# Altium PCB PCB.PcbDoc (part 2 of 3)
Units mm, origin at the board's own origin, x right, y up, seen from the top; angles counter-clockwise.
Board outline 82.04 x 50.04 mm, 4 copper layers (Top Layer, Layer 1, Layer 2, Bottom Layer), stack 1.604 mm thick; 179 components, 140 nets, 1023 pads, 520 vias.
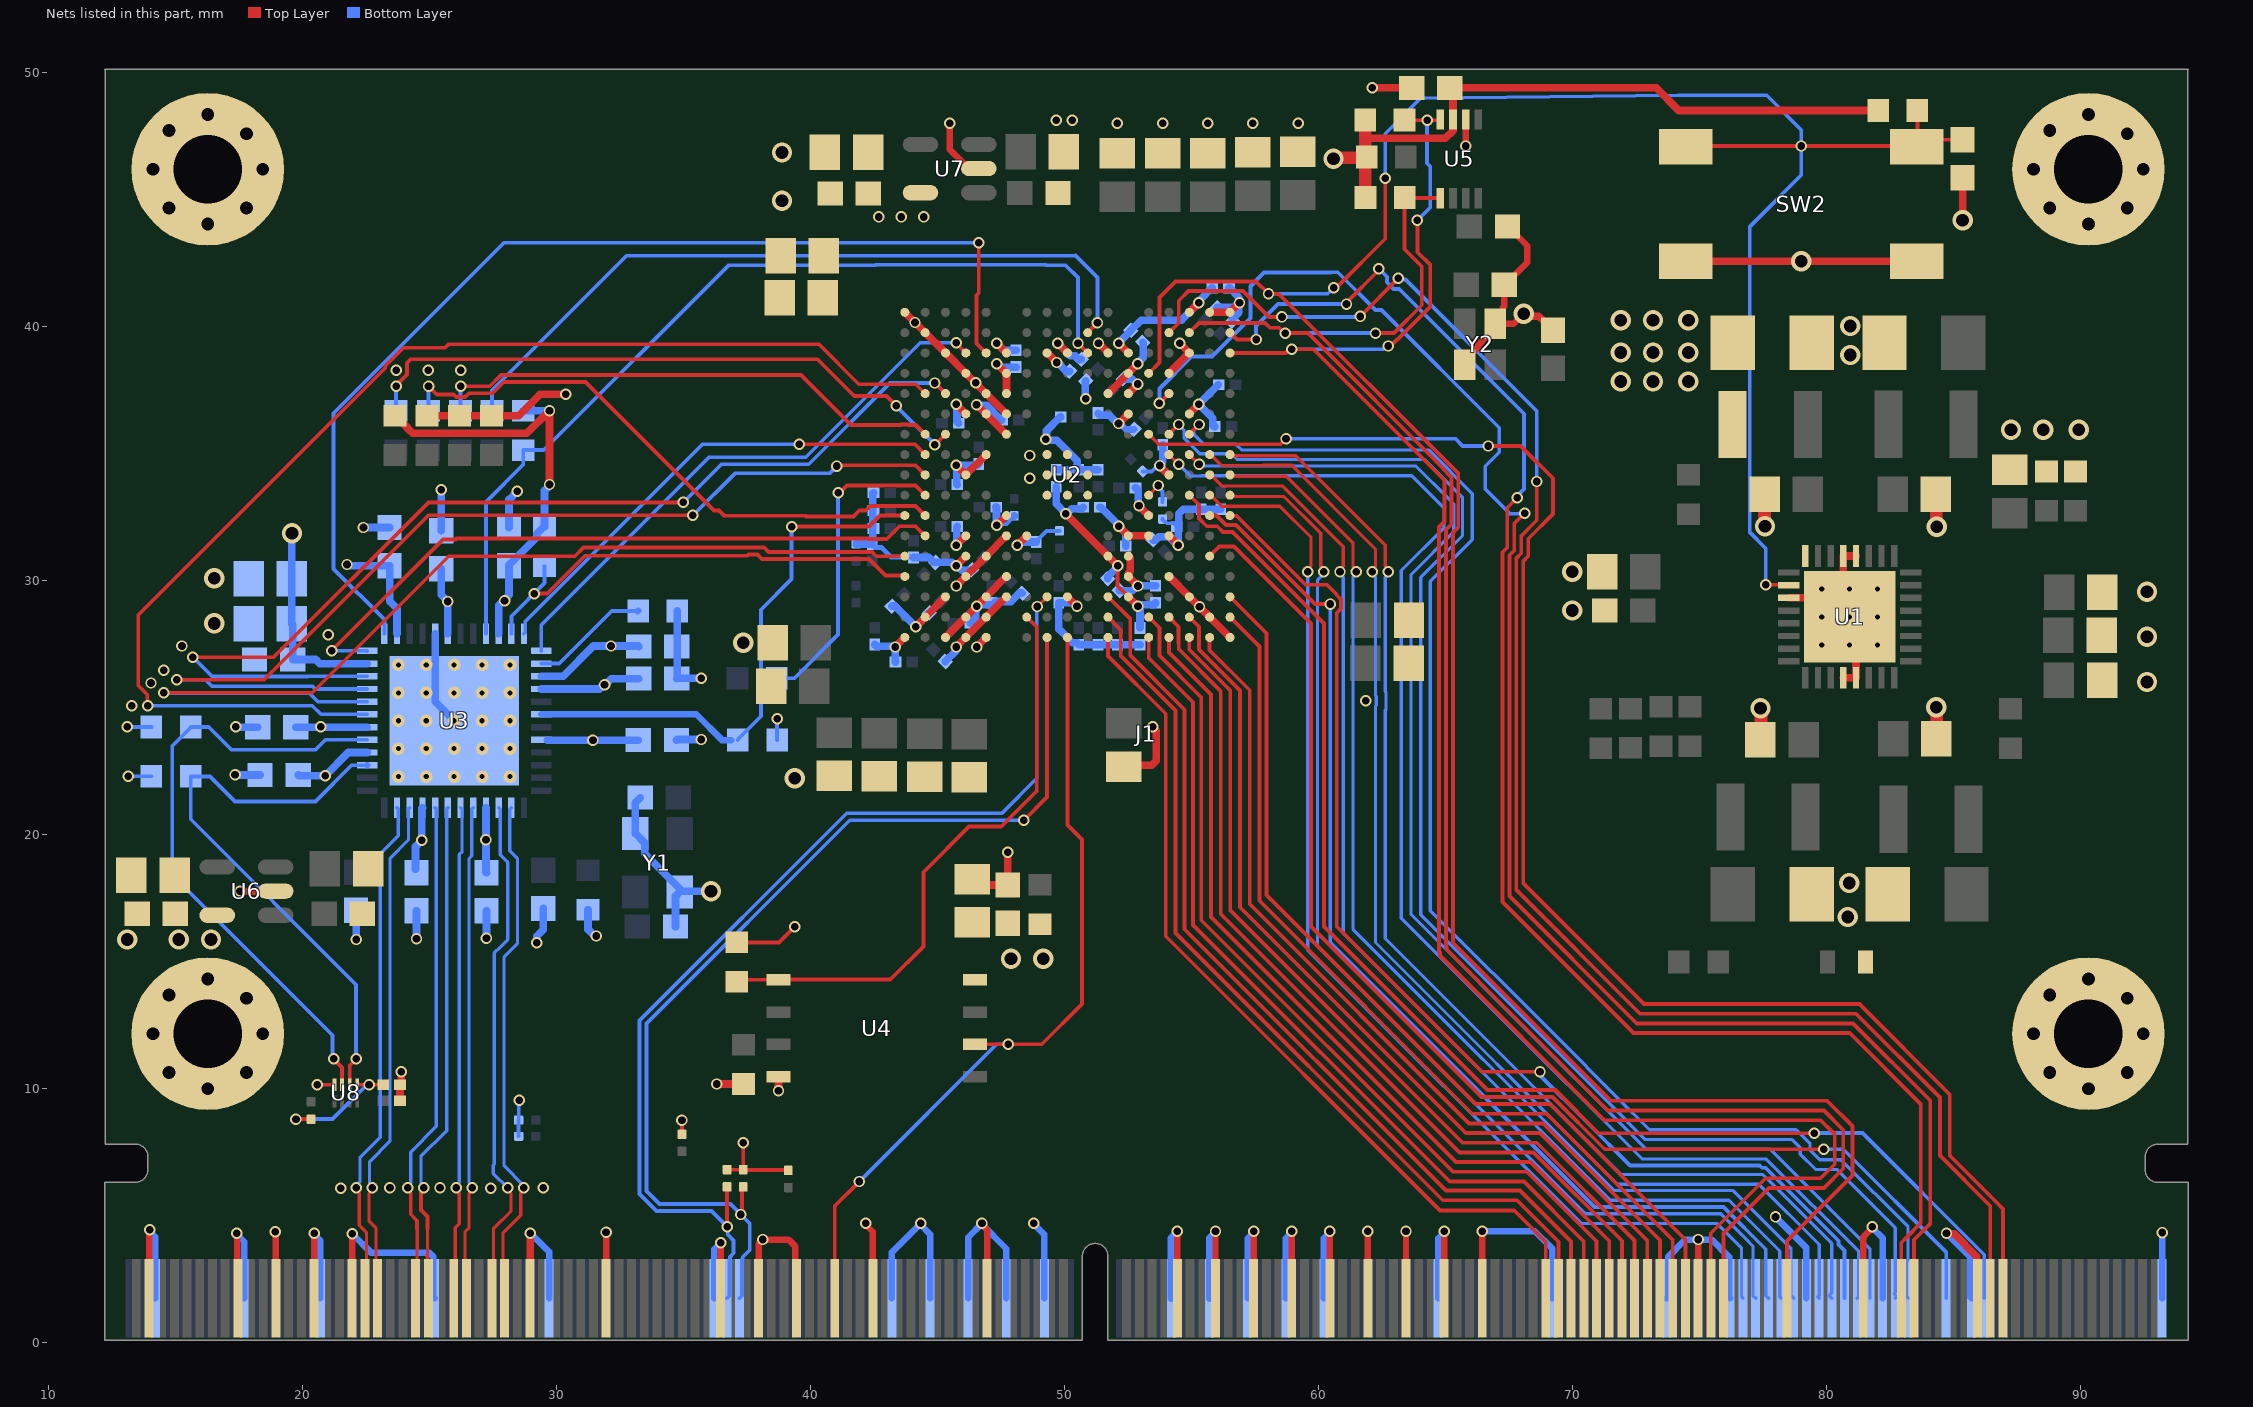
[diagram p4: the nets of this part, all layers, seen from the top]

## Via types
v1: diameter 0.45, hole 0.3, Top Layer to Bottom Layer, tented both sides, 367 vias
v2: diameter 0.8, hole 0.5, Top Layer to Bottom Layer, tented both sides, 87 vias
v3: diameter 0.5, hole 0.2, Top Layer to Bottom Layer, 34 vias
v4: diameter 0.8, hole 0.5, Top Layer to Bottom Layer, 32 vias

## Nets (pads, with @x,y where several pads share a name; then routed paths per layer and width w, separated by ;. In a path a pad name is that pad's centre, name@x,y a point inside that pad or via, vN(x,y) a via of type N, cw(c..) or ccw(c..) an arc to the next point about the centre after c; other vN are vias at no path point) (continued)
ETH1V8: C12.2 C13.2 C79.2 C80.2 C81.2 C96.2 C97.2 C102.2 R10.2 R14.2 R15.2 R16.2 R17.2 R24.2 R26.2 R27.2 R28.2 R31.2 R34.2 R36.2 R37.2 R38.2 R41.2 R44.1 U3.16 U3.34 U3.40 U4.8 U6.5 U8.1 | length 41.3
  Top Layer w0.15: v1(19.729,8.807) R44.1@20.32,8.807 ; U8.1@22.144,10.16 v1(22.606,10.16) C102.2@23.165,10.16 ; R38.2@34.925,8.211 v1(34.925,8.763) ; R34.2@36.703,6.814 R31.2@37.338,6.814 ; R26.2@37.084,15.761 38.748,15.761 v1(39.37,16.383) ; v1(37.338,7.874) R31.2@37.338,6.814 ; R41.2@39.112,6.787 39.098,6.801 37.352,6.801 R31.2@37.338,6.814
  Top Layer w0.3: R10.2@23.622,36.501 23.647,36.501 24.134,36.014 24.134,35.995 24.328,35.801 28.816,35.801 v1(29.711,36.696) v1(29.711,33.789) ; v1(36.296,10.186) R27.2@37.353,10.186
  Bottom Layer w0.15: v1(13.091,24.247) R17.2@14.035,24.247 ; v1(13.131,22.302) R16.2@14.035,22.302 ; v1(19.729,8.807) 21.171,8.807 22.525,10.16 v1(22.606,10.16) ; R37.2@28.492,8.128 R36.2@28.492,8.763 28.502,8.774 28.502,9.544 v1(28.513,9.554) ; R24.2@38.671,23.727 v1(38.671,24.574)
  Bottom Layer w0.3: C79.2@19.812,22.352 19.834,22.33 v1(20.878,22.33) 21.787,23.239 U3.16@22.533,23.239 ; U3.34@27.708,27.914 27.708,29.033 28.117,29.442 C80.2@28.117,30.597 28.117,30.622 29.214,31.719 29.214,31.847 29.489,32.122 R15.2@29.514,32.122 29.514,33.552 29.711,33.749 v1(29.711,33.789) ; R14.2@28.675,36.696 v1(29.711,36.696) ; U3.40@29.383,25.739 31.668,25.739 31.836,25.908 31.918,25.908 32.15,26.14 C81.2@33.222,26.14
  other v1: 31.877,25.908 27.94,29.21
  other v2: 47.879,15.113 49.149,15.113 15.113,15.875 16.383,15.875
ETH1V15: C9.1 C69.2 C70.2 C71.2 C72.2 C73.2 C74.2 C75.2 C76.2 C77.2 C78.2 L4.2 U1.32 U3.4 U3.9 U3.18 U3.23 U3.26 U3.30 U3.39 U3.44 | length 31
  Bottom Layer w0.3: v2(19.569,31.866) C70.2@19.569,30.077 C69.2@19.569,28.299 19.596,28.272 C76.2@19.596,26.902 20.497,26.902 20.66,26.739 U3.23@22.533,26.739 ; C74.2@19.723,24.235 19.727,24.239 U3.18@22.533,24.239 ; v1@21.727,30.597 C75.2@23.418,30.597 23.418,29.188 23.708,28.898 U3.26@23.708,27.914 ; C77.2@24.434,18.635 24.434,19.536 v1(24.688,19.79) 24.688,21.044 U3.9@24.708,21.064 ; C78.2@25.45,30.47 25.45,29.442 v1(25.708,29.184) U3.30@25.708,27.914 ; U3.4@27.208,21.064 27.208,18.528 C73.2@27.228,18.508 ; U3.39@29.383,26.239 30.248,26.239 31.441,27.432 33.2,27.432 C72.2@33.222,27.41 ; U3.44@29.633,23.727 C71.2@33.209,23.727
  other v1: 27.208,19.796 31.421,23.727 20.701,24.257 32.131,27.432 21.738,30.639
  other v2: 71.882,37.846 73.152,37.846 74.549,37.846 71.882,38.989 73.152,38.989 74.549,38.989 71.882,40.259 73.152,40.259 74.549,40.259
ETH_NRST: R24.1 U2.G17 U3.42 | length 21.8
  Top Layer w0.15: v1(39.243,32.131) 42.291,32.131 42.728,32.568 U2.G17@43.7,32.568
  Bottom Layer w0.15: R24.1@37.121,23.727 37.121,23.752 38.036,24.667 38.036,28.858 39.243,30.065 v1(39.243,32.131)
  Bottom Layer w0.254: U3.42@29.383,24.739 35.487,24.739 36.499,23.727 R24.1@36.867,23.727
ETH_PHY_G125CK: R19.2 U2.H16 | length 12.4
  Top Layer w0.15: v1(41.071,33.467) 41.15,33.467 41.429,33.746 44.123,33.746 U2.H16@44.5,33.368
  Bottom Layer w0.15: R19.2@38.661,26.16 39.352,26.16 41.071,27.879 v1(41.071,33.467)
ETH_PHY_INT: R18.2 U3.38 | length 4.7
  Bottom Layer w0.15: U3.38@29.383,26.739 30.095,26.739 32.163,28.807 R18.2@33.19,28.807
  Bottom Layer w0.254: R18.2@33.19,28.807 R18.2@33.197,28.814
ETH_PHY_LED1#: R17.1 U3.17 U8.3 | length 24.6
  Top Layer w0.15: v1(21.209,11.176) 21.544,10.841 U8.3@21.544,10.16
  Bottom Layer w0.15: R17.1@15.585,24.222 14.859,23.495 14.859,18.415 21.168,12.106 21.168,11.217 v1(21.209,11.176) ; R17.1@15.585,24.247 16.295,24.247 17.195,23.346 20.497,23.346 20.89,23.739 U3.17@22.533,23.739
ETH_PHY_LED2#: R16.1 U3.15 U8.2 | length 22.8
  Top Layer w0.15: U8.2@21.844,10.16 21.844,10.922 v1(22.098,11.176)
  Bottom Layer w0.15: R16.1@15.585,22.302 15.585,20.61 22.098,14.097 v1(22.098,11.176) ; R16.1@15.633,22.29 16.347,22.29 17.322,21.314 20.497,21.314 21.92,22.737 U3.15@22.533,22.739
  Bottom Layer w0.254: U3.15@22.533,22.739 U3.15@22.533,22.739
ETH_PHY_TXRX_A_N: J1.P29 U3.3 | length 20.3
  Top Layer w0.128: J1.P29@27.442,1.751 27.501,1.81 27.501,4.485 28.193,5.178 28.193,5.882 28.067,6.009 v1(28.067,6.096)
  Bottom Layer w0.128: U3.3@27.708,21.064 27.767,21.005 27.767,19.211 28.067,18.912 28.067,15.875 27.764,15.572 27.54,15.348 27.54,7.035 27.501,6.996 27.501,6.662 v1(28.067,6.096)
ETH_PHY_TXRX_A_P: J1.P30 U3.2 | length 20.4
  Top Layer w0.128: J1.P30@27.942,1.751 27.883,1.81 27.883,4.327 28.576,5.02 28.576,5.882 28.702,6.009 v1(28.702,6.096)
  Bottom Layer w0.128: U3.2@28.208,21.064 28.149,21.005 28.149,19.37 28.449,19.07 28.449,15.717 27.922,15.19 27.922,6.963 28.702,6.183 v1(28.702,6.096)
ETH_PHY_TXRX_B_N: J1.P26 U3.6 | length 19.6
  Top Layer w0.128: J1.P26@25.942,1.751 26.001,1.81 26.001,4.527 26.161,4.688 26.161,5.882 26.035,6.009 v1(26.035,6.096)
  Bottom Layer w0.128: v1(26.035,6.096) 26.035,6.183 26.161,6.31 26.161,19.224 26.267,19.33 26.267,21.005 U3.6@26.208,21.064
ETH_PHY_TXRX_B_P: J1.P27 U3.5 | length 19.6
  Top Layer w0.128: J1.P27@26.442,1.751 26.383,1.81 26.383,4.369 26.544,4.53 26.544,5.882 26.67,6.009 v1(26.67,6.096)
  Bottom Layer w0.128: v1(26.67,6.096) 26.67,6.183 26.544,6.31 26.544,19.066 26.649,19.171 26.649,21.005 U3.5@26.708,21.064
ETH_PHY_TXRX_C_N: J1.P23 U3.8 | length 20
  Top Layer w0.128: J1.P23@24.49,1.799 24.49,3.668 24.5,3.678 24.5,4.502
  Top Layer w0.15: v1(24.13,6.096) 24.13,6.015 24.246,5.899 24.246,5.058 24.5,4.804 24.5,4.502 ; J1.P23@24.442,1.751 J1.P23@24.49,1.799
  Bottom Layer w0.128: v1(24.13,6.096) 24.13,6.183 24.246,6.299 24.246,7.507 25.256,8.518 25.256,21.003 25.243,21.016 U3.8@25.256,21.016
  Bottom Layer w0.15: U3.8@25.208,21.064 U3.8@25.256,21.016
ETH_PHY_TXRX_C_P: J1.P24 U3.7 | length 20
  Top Layer w0.128: J1.P24@24.894,1.799 24.894,3.501 24.904,3.511 24.904,4.502
  Top Layer w0.15: v1(24.765,6.096) 24.765,6.015 24.65,5.899 24.65,5.225 24.904,4.971 24.904,4.502 ; J1.P24@24.894,1.799 J1.P24@24.942,1.751
  Bottom Layer w0.128: v1(24.765,6.096) 24.765,6.183 24.65,6.299 24.65,7.34 25.66,8.351 25.66,21.003 25.673,21.016 U3.7@25.66,21.016
  Bottom Layer w0.15: U3.7@25.66,21.016 U3.7@25.708,21.064
ETH_PHY_TXRX_D_N: J1.P19 U3.11 | length 20.2
  Top Layer w0.128: v1(22.098,6.096) 22.098,6.009 22.224,5.882 22.224,4.621 22.501,4.345 22.501,1.81 J1.P19@22.442,1.751
  Bottom Layer w0.128: v1(22.098,6.096) 22.098,6.183 22.246,6.331 22.246,7.284 23.046,8.084 23.046,19.252 23.756,19.962 23.756,21.003 23.743,21.016 U3.11@23.756,21.016
  Bottom Layer w0.15: U3.11@23.708,21.064 U3.11@23.756,21.016
ETH_PHY_TXRX_D_P: J1.P20 U3.10 | length 20.2
  Top Layer w0.128: v1(22.733,6.096) 22.733,6.009 22.607,5.882 22.607,4.779 22.883,4.503 22.883,1.81 J1.P20@22.942,1.751
  Bottom Layer w0.128: v1(22.733,6.096) 22.733,6.183 22.628,6.288 22.628,7.126 23.428,7.926 23.428,19.063 24.16,19.795 24.16,21.003 24.173,21.016 U3.10@24.16,21.016
  Bottom Layer w0.15: U3.10@24.16,21.016 U3.10@24.208,21.064
GND: C1.1 C2.2 C3.1 C4.1 C5.2 C6.1 C7.2 C8.1 C9.2 C10.1 C11.1 C12.1 C13.1 C14.1 C15.1 C16.1 C17.1 C18.1 C19.1 C20.1 C21.1 C22.1 C23.1 C24.1 C25.1 C26.1 C27.1 C28.1 C29.1 C30.1 C31.1 C32.1 C33.1 C34.1 C35.1 C36.1 C37.1 C38.1 C39.1 C40.1 C41.1 C42.1 C43.1 C44.1 C45.1 C46.1 C47.1 C48.1 C49.1 C50.1 C51.1 C52.1 C53.1 C54.1 C55.1 C56.1 C57.1 C58.1 C59.1 C60.1 C61.1 C62.1 C63.1 C64.1 C65.1 C66.1 C67.1 C68.1 C69.1 C70.1 C71.1 C72.1 C73.1 C74.1 C75.1 C76.1 C77.1 C78.1 C79.1 C80.1 C81.1 C82.1 C83.1 C84.1 C85.1 C86.1 C87.1 C88.1 C89.2 C90.1 C91.1 C92.1 C93.1 C94.1 C95.1 C96.1 C97.1 C98.1 C99.1 C100.1 C101.1 C102.1 C103.1 C104.1 C105.1 C106.1 C107.1 C108.1 C109.1 C110.1 C111.1 C112.1 C113.1 C114.1 C115.1 C116.1 C117.1 J1.315 J1.P2 J1.P9 J1.P12 J1.P15 J1.P18 J1.P32 J1.P38 J1.P47 J1.P50 J1.P53 J1.P59 J1.P68 J1.P79 J1.P82 J1.P85 J1.P88 J1.P91 J1.P94 J1.P97 J1.P100 J1.P103 J1.P120 J1.P133 J1.P142 J1.S3 J1.S10 J1.S16 J1.S25 J1.S34 J1.S47 J1.S61 J1.S64 J1.S67 J1.S70 J1.S73 J1.S80 J1.S83 J1.S86 J1.S89 J1.S92 J1.S101 J1.S110 J1.S119 J1.S124 J1.S130 J1.S136 J1.S143 J1.S158 LED1.2 R1.2 R2.2 R7.1 R11.1 R12.1 R13.1 R18.1 R25.1 R29.1 R30.1 R32.1 R43.1 SW2.3 SW2.4 U1.3 U1.12 U1.13 U1.28 U1.29 U1.33 U2.A1 U2.A13 U2.A14 U2.A15 U2.A17 U2.B2 U2.B13 U2.B14 U2.B16 U2.C3 U2.C9 U2.C12 U2.C13 U2.C15 U2.D4 U2.D6 U2.D12 U2.D14 U2.E6 U2.E13 U2.E14 U2.F4 U2.F5 U2.F6 U2.F11 U2.F12 U2.F14 U2.G5 U2.G12 U2.H8 U2.H9 U2.H10 U2.J4 U2.J8 U2.J9 U2.J10 U2.J14 U2.K9 U2.K10 U2.K13 U2.L12 U2.M3 U2.M6 U2.M12 U2.M13 U2.M14 U2.N6 U2.N7 U2.N12 U2.N13 U2.P4 U2.P6 U2.P12 U2.P14 U2.R3 U2.R7 U2.R10 U2.R15 U2.T16 U2.U1 U2.U2 U2.U17 U3.29 U3.49 U4.4 U5.2 U6.2 U7.2 U8.4 Y1.2 Y1.4 Y2.2 Y2.4 | length 314
  Top Layer w0.15: v1(20.574,10.16) U8.4@21.244,10.16
  Top Layer w0.254: J1.P2@13.942,1.751 13.956,1.765 13.956,4.431 v1(13.97,4.445) ; v1(17.399,4.318) 17.421,4.296 17.421,1.772 J1.P9@17.442,1.751 ; v1(18.914,4.375) 18.928,4.361 18.928,1.765 J1.P12@18.942,1.751 ; J1.P15@20.442,1.751 20.442,4.313 v1(20.447,4.318) ; J1.P18@21.942,1.751 v1(21.942,4.289) ; v1(31.937,4.344) 31.939,4.341 31.939,1.754 J1.P38@31.942,1.751 ; J1.P47@36.442,1.751 36.445,1.754 36.445,3.933 v1(36.449,3.937) ; J1.P50@37.942,1.751 37.942,3.906 v1(38.1,4.064) 39.116,4.064 39.394,3.786 39.394,1.799 J1.P53@39.442,1.751 ; v1(42.164,4.699) 42.164,4.646 42.442,4.368 J1.P59@42.442,1.751 ; v1(45.466,48.006) 45.466,46.978 46.216,46.228 U7.2@46.616,46.228 ; v1(46.736,4.699) 46.736,4.646 46.942,4.44 J1.P68@46.942,1.751 ; J1.P79@54.431,1.751 v1(54.431,4.393) ; J1.P82@55.931,1.751 v1(55.931,4.393) ; J1.P85@57.431,1.751 v1(57.431,4.393) ; J1.P88@58.931,1.751 v1(58.931,4.393) ; J1.P91@60.431,1.751 v1(60.431,4.393) ; J1.P94@61.931,1.751 v1(61.931,4.393) ; J1.P97@63.431,1.751 v1(63.431,4.393) ; J1.P100@64.931,1.751 v1(64.931,4.393) ; Y2.4@65.594,38.347 Y2.4@65.744,38.497 65.744,38.672 66.267,39.195 66.267,39.263 66.421,39.417 66.421,39.424 66.944,39.947 Y2.2@66.944,40.122 ; U5.2@65.782,48.159 65.786,48.155 v1(65.786,47.117) ; J1.P103@66.431,1.751 v1(66.431,4.393) ; C92.1@67.425,43.942 67.45,43.942 68.199,43.193 68.199,42.532 67.323,41.656 C88.1@67.298,41.656 67.298,40.8 67.242,40.744 67.242,40.42 Y2.2@66.944,40.122 ; v2(68.072,40.513) 68.062,40.513 67.671,40.122 Y2.2@66.944,40.122 ; J1.P120@74.931,1.752 v1(74.93,4.064) ; J1.P133@81.431,1.751 81.431,4.162 81.788,4.519 v1(81.788,4.572)
  Top Layer w0.3: v1(17.526,17.78) U6.2@18.93,17.779 ; C103.1@23.825,9.525 C102.1@23.825,10.16 23.876,10.211 v1(23.876,10.668) ; R13.1@24.892,36.501 R12.1@26.162,36.501 R11.1@27.432,36.501 28.5,36.501 29.337,37.338 v1(30.353,37.338) ; J1.P32@28.942,1.751 28.949,1.758 28.949,4.311 v1(28.956,4.318) ; v1(38.725,9.916) U4.4@38.725,10.48 ; v1@43.325,27.393 U2.A17@43.7,27.768 ; U2.U17@43.7,40.568 U2.T16@44.5,39.768 U2.R15@45.3,38.968 U2.P14@46.1,38.168 U2.N13@46.9,37.368 U2.M12@47.7,36.568 ; v1@44.125,28.193 U2.B16@44.5,28.568 U2.C15@45.3,29.368 ; U2.A15@45.3,27.768 U2.C13@46.9,29.368 U2.D12@47.7,30.168 ; v1@45.725,27.393 U2.A14@46.1,27.768 U2.C12@47.7,29.368 ; v1@45.725,29.793 U2.D14@46.1,30.168 46.525,30.592 ; v1@45.725,30.593 U2.E14@46.1,30.968 ; v1(45.725,31.392) U2.F14@46.1,31.768 ; v1(45.724,34.544) U2.J14@46.1,34.168 U2.K13@46.9,34.968 ; v1(45.724,36.944) U2.M14@46.1,36.568 ; C12.1@46.355,18.249 46.582,18.022 C13.1@47.752,18.022 v1(47.752,19.304) ; v1@46.524,36.934 46.899,36.559 46.91,36.559 U2.L12@47.7,35.768 ; v1@46.525,27.393 U2.A13@46.9,27.768 ; 46.525,30.593 U2.E13@46.9,30.968 U2.F12@47.7,31.768 ; v1@47.324,38.544 U2.P12@47.7,38.168 U2.N12@47.7,37.368 ; v1(47.325,32.192) U2.G12@47.7,32.568 ; v1(48.125,31.392) U2.F11@48.5,31.768 ; U2.R10@49.3,38.968 v1(49.676,38.593) ; U2.C9@50.101,29.378 v1(50.477,29.003) ; v1@51.325,39.344 U2.R7@51.7,38.968 ; U2.N7@51.7,37.368 U2.P6@52.5,38.168 ; v1(52.114,36.19) U2.M6@52.489,36.565 ; v1(52.118,32.151) U2.F6@52.5,31.768 U2.F5@53.3,31.768 ; C17.1@52.324,22.684 52.373,22.733 53.418,22.733 53.594,22.909 53.594,24.089 53.467,24.216 v1(53.467,24.257) ; U2.E6@52.5,30.968 52.5,30.953 52.577,30.876 52.577,30.386 52.511,30.32 52.511,30.179 U2.D6@52.5,30.168 v1@52.876,29.793 ; U2.N6@52.5,37.368 v1(52.876,37.745) ; U2.P6@52.5,38.168 v1(52.876,38.545) ; v1@52.918,32.951 U2.G5@53.3,32.568 ; v1@53.724,34.534 U2.J4@54.099,34.159 ; U2.D4@54.1,30.168 U2.C3@54.9,29.368 54.904,29.368 55.295,28.977 v1(55.299,28.977) 55.299,28.973 55.7,28.573 U2.B2@55.7,28.568 U2.A1@56.5,27.768 ; U2.F4@54.101,31.778 v1@54.476,31.403 ; U2.J4@54.1,34.167 U2.J4@54.1,34.168 ; U2.P4@54.1,38.168 U2.R3@54.9,38.968 v1@54.525,39.344 ; U2.M3@54.9,36.568 v1(55.276,36.944) ; U2.U2@55.7,40.568 U2.U1@56.5,40.568 v1(56.876,40.945) ; v1(62.103,49.403) C91.1@63.651,49.403 ; v2(68.072,40.513) 68.168,40.417 68.664,40.417 68.865,40.216 68.89,40.216 69.215,39.891 C87.1@69.215,39.866 ; SW2.3@74.444,42.581 SW2.4@83.544,42.581 ; U1.3@78.499,29.325 80.149,29.325 80.649,28.825 U1.29@80.649,30.975 U1.28@81.149,30.975 ; U1.12@80.649,26.175 U1.13@81.149,26.175 81.149,28.325 v3(80.899,28.575) ; v1(84.709,4.318) 84.738,4.289 85.007,4.289 85.906,3.39 85.906,1.776 J1.P142@85.931,1.751 ; v2(85.344,44.196) C89.2@85.344,45.859
  Top Layer w0.5: C4.1@77.407,23.735 v2@77.407,24.966 ; v2@77.548,32.17 C8.1@77.548,33.401 ; C6.1@84.289,33.401 84.308,33.382 84.308,32.151 v2(84.328,32.131) ; C1.1@84.331,23.768 v2@84.331,24.999
  Bottom Layer w0.15: v1@47.354,32.221 47.684,32.221 R30.1@48.006,32.543 ; C44.1@48.868,31.526 48.868,31.546 49.282,31.96 R29.1@49.784,31.96 ; R7.1@53.071,34.305 53.079,34.297 53.221,34.297 53.23,34.305 53.423,34.305 53.654,34.536 v1(53.735,34.536) ; R32.1@53.848,32.429 53.848,32.416 53.948,32.316 53.96,32.316 54.011,32.266 54.272,32.266 C65.1@54.407,32.131
  Bottom Layer w0.2: C101.1@42.418,31.425 42.528,31.315 42.775,31.315 43.148,30.941 44.018,30.941 C50.1@44.042,30.917
  Bottom Layer w0.254: v1(13.97,4.445) 13.97,4.392 14.192,4.17 J1.S3@14.192,1.75 ; v1(17.399,4.318) 17.399,4.265 17.692,3.972 J1.S10@17.692,1.75 ; v1(20.447,4.318) 20.447,4.265 20.692,4.02 J1.S16@20.692,1.75 ; v1(21.942,4.289) 22.679,3.552 24.971,3.552 25.144,3.379 25.144,1.798 J1.S25@25.192,1.75 ; v1(28.956,4.318) 29.692,3.582 J1.S34@29.692,1.75 ; J1.S47@36.192,1.75 36.192,3.681 v1(36.449,3.937) ; J1.S61@43.192,1.75 43.192,3.568 v1(44.323,4.699) 44.323,4.646 44.692,4.277 J1.S64@44.692,1.75 ; J1.S67@46.192,1.75 46.192,4.155 v1(46.736,4.699) 46.736,4.659 47.692,3.703 J1.S70@47.692,1.75 ; v1(48.768,4.699) 48.768,4.69 49.192,4.266 J1.S73@49.192,1.75 ; v1(52.114,36.19) 52.167,36.19 52.395,35.962 52.58,35.962 52.594,35.948 52.712,35.948 C58.1@52.726,35.962 ; J1.S86@57.197,1.751 57.197,4.106 57.431,4.34 v1(57.431,4.393) ; J1.S89@58.697,1.751 58.697,4.106 58.931,4.34 v1(58.931,4.393) ; J1.S92@60.197,1.751 60.197,4.106 60.431,4.34 v1(60.431,4.393) ; J1.S101@64.697,1.751 64.697,4.106 64.931,4.34 v1(64.931,4.393) ; v1(66.431,4.393) 68.505,4.393 69.197,3.701 J1.S110@69.197,1.751 ; J1.S119@73.697,1.751 73.745,1.799 73.745,3.38 74.429,4.064 v1(74.93,4.064) 75.465,4.064 76.149,3.38 76.149,1.799 J1.S124@76.197,1.751 ; v1(77.978,4.953) 79.197,3.734 J1.S130@79.197,1.751 ; v1(81.788,4.572) 81.788,4.533 82.197,4.124 J1.S136@82.197,1.751 ; v1(84.709,4.318) 85.474,3.553 85.476,3.553 85.649,3.38 85.649,1.799 J1.S143@85.697,1.751 ; J1.S158@93.197,1.751 v1(93.197,4.339)
  Bottom Layer w0.3: v1@17.272,22.352 C79.1@18.312,22.352 ; v1@17.294,24.235 C74.1@18.223,24.235 ; v1(22.098,15.875) C82.1@22.098,17.03 ; v1(22.386,32.097) C75.1@23.418,32.097 ; v1(24.475,15.911) C77.1@24.475,17.008 ; U3.29@25.208,27.914 25.208,25.239 v3(25.958,24.489) ; C78.1@25.45,31.97 v1(25.45,33.578) ; v1(27.228,15.925) C73.1@27.228,17.008 ; C80.1@28.117,32.097 28.117,33.197 v1(28.448,33.528) ; v1(29.21,15.748) 29.21,16.002 29.466,16.258 C83.1@29.466,17.098 ; R25.1@31.228,17.055 31.228,16.27 v1@31.496,16.002 ; C85.1@33.286,21.463 33.084,21.261 Y1.4@33.084,20.051 33.459,19.676 33.459,19.251 34.834,17.876 Y1.2@34.834,17.751 ; C86.1@34.671,16.383 34.671,17.588 Y1.2@34.834,17.751 ; C71.1@34.709,23.727 34.731,23.749 v1(35.687,23.749) ; C81.1@34.722,26.147 C81.1@34.737,26.162 ; R18.1@34.747,28.814 34.747,26.172 C81.1@34.737,26.162 ; v1(35.687,26.162) C81.1@34.737,26.162 ; v2(36.068,17.78) 34.863,17.78 Y1.2@34.834,17.751 ; R43.1@41.783,31.452 41.787,31.449 42.414,31.449 C101.1@42.418,31.445 ; C101.1@42.418,31.425 42.444,31.451 42.444,33.444 C110.1@42.469,33.47 ; C42.1@42.518,27.488 42.518,27.481 42.578,27.421 43.296,27.421 v1(43.325,27.392) 43.328,27.389 43.328,26.806 C43.1@43.331,26.802 ; C37.1@43.195,29.003 43.209,29.017 43.294,29.017 43.308,29.003 43.315,29.003 v1(44.125,28.192) C51.1@44.667,28.735 ; C50.1@44.042,30.917 44.636,30.917 44.83,30.723 44.915,30.723 44.925,30.733 45.544,30.733 45.684,30.592 v1(45.725,30.592) 45.766,30.592 45.944,30.414 46.319,30.414 C45.1@46.333,30.428 ; C35.1@45.292,26.823 45.696,27.228 45.696,27.364 v1(45.725,27.392) ; v1(45.724,36.944) 45.753,36.915 45.753,36.26 45.813,36.2 C21.1@45.82,36.2 ; v1(45.725,31.392) 45.747,31.414 45.747,32.114 C41.1@45.769,32.136 ; C38.1@45.769,33.787 45.747,33.81 45.747,34.521 v1(45.724,34.544) 46.549,34.544 46.609,34.604 C46.1@46.609,34.615 ; C34.1@46.277,28.326 46.297,28.326 46.357,28.386 46.357,28.406 46.496,28.545 46.496,28.964 v1(46.525,28.992) 46.566,28.992 46.633,29.059 47.157,29.059 47.157,29.062 47.277,29.182 47.877,29.182 48.22,29.525 48.305,29.525 C49.1@48.319,29.511 ; v1(46.523,36.934) 46.552,36.905 46.924,36.905 47.502,36.327 C57.1@47.522,36.327 ; C40.1@47.288,32.904 C40.1@47.293,32.898 47.309,32.883 47.309,32.208 v1(47.325,32.192) v1@47.354,32.221 ; v1(47.323,38.544) 47.364,38.544 47.494,38.413 C26.1@48.079,38.413 ; R30.1@48.006,32.543 R30.1@48.006,32.556 ; v1(48.125,31.392) 48.166,31.392 48.3,31.526 C44.1@48.868,31.526 ; C108.1@49.657,34.366 50.526,34.366 C112.1@50.546,34.386 ; v1(49.676,38.593) 49.716,38.593 50.062,38.248 50.073,38.248 50.087,38.234 50.172,38.234 C90.1@50.186,38.248 ; C52.1@49.835,36.449 49.815,36.449 49.277,35.911 49.277,35.594 v1(49.248,35.565) 49.277,35.537 49.68,35.537 50.486,34.731 50.486,34.426 C112.1@50.546,34.366 C113.1@51.308,34.366 ; v1(50.477,29.003) 50.437,29.003 50.3,29.139 C67.1@49.757,29.139 49.757,28.103 50.297,27.563 50.486,27.563 50.546,27.503 C116.1@50.546,27.483 C115.1@51.308,27.483 C114.1@52.07,27.483 C106.1@52.959,27.483 ; v1@50.807,37.204 50.807,37.853 C39.1@50.821,37.867 ; C60.1@51.308,36.601 51.308,36.581 51.368,36.521 51.742,36.521 52.073,36.19 v1(52.114,36.19) ; v1(51.324,39.344) v1@51.353,39.372 ; C107.1@51.384,32.893 51.404,32.893 52.118,32.179 v1(52.118,32.151) 52.4,31.869 C62.1@52.4,31.369 ; C27.1@52.15,29.617 52.164,29.603 52.647,29.603 52.837,29.793 v1(52.877,29.793) 52.88,29.796 53.564,29.796 C28.1@53.567,29.799 ; C59.1@52.296,37.945 52.31,37.959 52.395,37.959 52.409,37.945 52.634,37.945 52.835,37.745 v1(52.876,37.745) ; C61.1@52.781,33.655 52.801,33.655 52.861,33.595 52.861,33.575 52.889,33.547 52.889,32.982 v1(52.918,32.953) ; v1(52.876,38.545) 52.876,38.586 53.079,38.79 53.079,39.377 C24.1@53.065,39.391 ; C66.1@53.461,31.608 53.475,31.594 53.56,31.594 53.694,31.727 54.099,31.727 54.425,31.401 v1(54.466,31.401) C65.1@54.466,32.071 ; v1(53.735,34.536) 53.735,34.577 53.848,34.69 C22.1@53.848,35.357 ; J1.S80@54.197,1.751 54.197,4.118 54.431,4.353 v1(54.431,4.393) ; C65.1@54.485,32.191 54.485,32.641 54.661,32.817 C20.1@55.372,32.817 C105.1@56.134,32.817 ; v1@54.495,39.315 v1(54.524,39.344) ; J1.S83@55.697,1.751 55.697,4.118 55.931,4.353 v1(55.931,4.393) ; C68.1@55.904,36.073 55.884,36.073 55.824,36.133 55.824,36.395 v1(55.276,36.944) 55.276,36.957 C56.1@56.038,37.719 ; C23.1@55.986,40.746 56,40.76 56.651,40.76 56.835,40.945 v1(56.876,40.945) ; C117.1@56.464,41.529 56.484,41.529 56.847,41.166 56.847,40.973 v1(56.876,40.945) ; C104.1@56.59,40.215 56.59,40.3 56.847,40.557 56.847,40.916 v1(56.876,40.945)
  other v1: 21.491,6.09 23.429,6.097 25.4,6.096 27.398,6.088 29.464,6.096 31.555,16.015 17.331,22.365 17.353,24.248 13.258,25.085 61.849,25.273 14.02,25.974 14.528,26.482 46.525,27.392 15.24,27.432 21.005,27.879 45.725,29.792 48.613,34.041 48.613,34.93 50.815,37.168 46.497,37.792 23.672,38.293 24.942,38.293 26.212,38.293 44.1,40.168 52.07,48.006 53.848,48.006 55.626,48.006 57.404,48.006 59.182,48.006 49.657,48.133 50.292,48.133
  other v2: 13.081,15.875 80.825,16.765 80.88,18.102 39.37,22.225 77.388,24.985 84.312,25.019 92.603,26.015 37.338,27.559 92.603,27.793 16.51,28.321 69.977,28.829 92.603,29.571 16.51,30.099 69.977,30.353 77.568,32.15 87.249,35.941 88.519,35.941 89.916,35.941 80.922,38.887 80.922,40.03 78.994,42.581 38.862,44.958 38.862,46.863
  other v3: 23.758,22.289 24.858,22.289 25.958,22.289 27.058,22.289 28.158,22.289 23.758,23.389 24.858,23.389 25.958,23.389 27.058,23.389 28.158,23.389 23.758,24.489 24.858,24.489 27.058,24.489 28.158,24.489 23.758,25.589 24.858,25.589 25.958,25.589 27.058,25.589 28.158,25.589 23.758,26.689 24.858,26.689 25.958,26.689 27.058,26.689 28.158,26.689 79.799,27.475 80.899,27.475 81.999,27.475 79.799,28.575 81.999,28.575 79.799,29.675 80.899,29.675 81.999,29.675
  other v4: 16.256,10.006 90.297,10.006 14.732,10.641 17.78,10.641 88.773,10.641 91.821,10.641 14.097,12.165 18.415,12.165 88.138,12.165 92.456,12.165 17.78,13.562 91.821,13.562 14.732,13.689 88.773,13.689 16.256,14.324 90.297,14.324 16.256,44.042 90.297,44.042 14.732,44.677 17.78,44.677 88.773,44.677 91.821,44.677 14.097,46.201 18.415,46.201 88.138,46.201 92.456,46.201 17.78,47.598 91.821,47.598 14.732,47.725 88.773,47.725 16.256,48.36 90.297,48.36
LCD_BKLT_EN: J1.S127 U2.G2 | length 43.6
  Top Layer w0.15: U2.G2@55.7,32.568 55.702,32.566 55.968,32.566 56.344,32.191 56.735,32.191 59.843,29.083 v1(60.452,29.083)
  Bottom Layer w0.15: v1(60.452,29.083) 60.452,15.748 70.856,5.344 75.936,5.344 77.597,3.683 77.597,1.851 J1.S127@77.697,1.751
LCD_BKLT_PWM: J1.S141 U2.E2 | length 49.5
  Top Layer w0.15: U2.E2@55.7,30.968 56.078,31.346 56.657,31.346 59.69,28.313 59.69,16.383 66.4,9.673 69.202,9.673 71.255,7.62 v1(79.883,7.62)
  Bottom Layer w0.15: v1(79.883,7.62) 80.645,7.62 84.697,3.568 J1.S141@84.697,1.751
LCD_VDD_EN: J1.S133 U2.G1 | length 46
  Top Layer w0.15: U2.G1@56.5,32.568 56.512,32.557 56.758,32.557 59.47,29.845 60.325,29.845 60.706,29.464 60.706,29.43 60.877,29.259 60.877,28.907 60.706,28.736 60.706,16.383 66.421,10.668 v1(68.707,10.668)
  Bottom Layer w0.15: v1(68.707,10.668) 68.764,10.611 68.764,10.466 70.51,8.72 72.256,6.974 77.354,6.974 77.439,6.889 77.591,6.889 80.461,4.019 80.461,3.867 80.697,3.631 J1.S133@80.697,1.751
MPU1V8: C24.2 C25.2 C26.2 C27.2 C28.2 C90.2 C91.2 C98.2 C99.2 C100.2 C106.2 C107.2 C108.2 C117.2 R33.2 R35.2 R39.2 R40.2 U2.C6 U2.E7 U2.R6 U2.R9 U2.R12 U2.U3 U5.3 U7.5 | length 44.9
  Top Layer w0.15: v1@52.078,30.592 52.078,29.791 U2.C6@52.5,29.368
  Top Layer w0.3: v1(47.324,39.344) U2.R12@47.699,38.968 ; v1(49.725,39.344) U2.R9@50.1,38.968 ; v1(50.038,32.639) 50.038,32.635 51.7,30.973 U2.E7@51.7,30.968 ; U2.E7@51.701,30.968 v1(52.077,30.593) ; v1@52.125,39.344 U2.R6@52.5,38.968 ; U2.C6@52.502,29.368 v1(52.878,28.993) ; U2.U3@54.9,40.568 v1(55.276,40.945) ; 61.828,47.371 61.877,47.42 64.982,47.42 65.282,47.72 U5.3@65.282,48.159 65.282,49.272 C91.2@65.151,49.403 73.279,49.403 74.168,48.514 R35.2@82.016,48.514
  Top Layer w0.5: v2(60.579,46.609) 60.619,46.649 61.838,46.649 R40.2@61.878,46.689 ; R33.2@61.821,48.12 61.828,48.112 61.828,47.371 61.828,45.093 R39.2@61.836,45.085
  Bottom Layer w0.3: v1(47.324,39.344) 47.595,39.073 C26.2@48.079,39.073 ; C108.2@49.657,33.706 49.657,33.026 50.038,32.645 v1(50.038,32.639) 50.079,32.639 50.273,32.833 50.664,32.833 C107.2@50.724,32.893 ; v1(49.725,39.344) 50.218,38.851 50.402,38.851 50.553,38.7 50.638,38.7 C90.2@50.652,38.714 ; C27.2@51.683,30.084 51.683,30.158 52.077,30.553 v1(52.077,30.593) ; v1(52.124,39.344) 52.124,39.363 52.599,39.838 C24.2@52.599,39.857 53,40.259 54.59,40.259 v1(55.276,40.945) 55.304,40.973 55.304,41.049 55.784,41.529 C117.2@55.804,41.529 ; C106.2@52.959,28.143 52.959,28.872 52.878,28.953 v1(52.878,28.993) 52.919,28.993 52.985,29.059 53.507,29.059 53.567,29.119 C28.2@53.567,29.139
  other v1: 42.672,44.323 43.561,44.323 44.45,44.323
MPU_CAN1_RX: J1.P144 U2.L5 | length 62.4
  Top Layer w0.15: U2.L5@53.3,35.768 53.694,35.375 58.489,35.375 v1(58.709,35.595) ; v1(66.675,35.306) 67.945,35.306 69.215,34.036 69.215,32.627 68.241,31.653 68.241,30.969 68.05,30.778 68.05,18.088 72.803,13.335 81.28,13.335 84.836,9.779 84.836,7.374 86.706,5.504 86.706,5.496 86.931,5.271 J1.P144@86.931,1.751
  Bottom Layer w0.15: v1(58.709,35.595) 65.37,35.595 65.659,35.306 v1(66.675,35.306)
MPU_CAN1_TX: J1.P143 U2.T4 | length 66.8
  Top Layer w0.15: U2.T4@54.1,39.768 54.483,40.151 54.483,41.021 54.864,41.402 57.019,41.402 58.035,40.386 v1(58.547,40.386) ; v1(61.629,40.406) v1@63.119,41.896 ; v1(68.58,33.909) 68.58,32.381 67.966,31.767 67.966,31.083 67.775,30.892 67.775,17.823 72.644,12.954 81.153,12.954 84.455,9.652 84.455,7.366 86.431,5.39 J1.P143@86.431,1.751
  Bottom Layer w0.15: v1(58.547,40.386) v1@61.595,40.386 ; v1(63.119,41.91) 63.168,41.861 63.406,41.861 68.58,36.687 v1(68.58,33.909)
MPU_DBGU_RX: J1.P137 U2.N4 | length 67.5
  Top Layer w0.15: v1@68.072,32.639 67.691,32.258 67.691,31.197 67.5,31.006 67.5,17.59 72.517,12.573 81.026,12.573 84.074,9.525 84.074,4.699 83.431,4.056 J1.P137@83.431,1.751
  Top Layer w0.16: v1(53.718,36.986) U2.N4@54.1,37.368
  Bottom Layer w0.15: 60.452,42.143 60.745,42.143 62.228,40.66 62.464,40.66 67.1,36.024 67.1,35.062 66.548,34.51 66.548,33.612 67.522,32.638 68.084,32.638 v1(68.1,32.654)
  Bottom Layer w0.16: v1(53.718,36.986) 53.718,37.559 54.991,38.833 55.795,38.833 57.306,40.344 57.306,41.595 57.848,42.138 60.452,42.138
MPU_DBGU_TX: J1.P136 U2.T1 | length 63
  Top Layer w0.15: v1(61.087,40.894) 61.087,40.957 62.357,42.227 v1(62.357,42.291) ; v1(67.818,33.274) 67.416,32.872 67.416,31.311 67.225,31.12 67.225,17.357 72.39,12.192 80.899,12.192 83.693,9.398 83.693,4.707 83.156,4.17 83.156,4.162 82.931,3.937 J1.P136@82.931,1.751
  Top Layer w0.16: U2.T1@56.5,39.768 56.772,39.497 v1(57.531,39.497)
  Bottom Layer w0.15: v1(57.531,39.497) 57.531,40.034 58.391,40.894 v1(61.087,40.894) ; v1(62.357,42.291) 62.679,41.969 62.679,41.749 62.943,41.485 63.163,41.485 68.072,36.576 68.072,33.609 67.818,33.355 v1(67.818,33.274)
MPU_DSI_CLK_N: J1.S135 U2.K3 | length 53.5
  Top Layer w0.128: U2.K3@54.9,34.968 v1(55.283,34.586)
  Bottom Layer w0.128: v1(55.283,34.586) 55.345,34.524 55.498,34.524 55.505,34.517 63.813,34.517 65.088,33.242 65.312,33.018 65.312,31.929 63.628,30.245 63.628,16.873 69.037,11.464 71.156,9.344 72.881,7.62 77.773,7.62 81.697,3.696 J1.S135@81.697,1.751
MPU_DSI_CLK_P: J1.S134 U2.K4 | length 53.9
  Top Layer w0.128: U2.K4@54.1,34.968 v1(54.483,34.586)
  Bottom Layer w0.128: v1(54.483,34.586) 54.941,34.128 55.354,34.128 55.361,34.135 63.655,34.135 64.93,32.86 64.93,32.087 63.246,30.403 63.246,16.714 68.878,11.082 70.774,9.186 72.722,7.238 77.601,7.238 77.686,7.153 77.7,7.153 81.256,3.597 81.256,1.81 J1.S134@81.197,1.751
MPU_DSI_D0_N: J1.S126 U2.H1 | length 44.7
  Top Layer w0.128: U2.H1@56.5,33.368 56.544,33.325 56.681,33.325 56.689,33.317 58.622,33.317 60.072,31.867 60.072,30.567 60.198,30.44 v1(60.198,30.353)
  Bottom Layer w0.128: v1(60.198,30.353) 60.198,30.266 59.945,30.013 59.945,15.62 70.485,5.08 75.819,5.08 76.043,4.856 76.801,4.098 77.089,3.81 77.089,1.859 J1.S126@77.197,1.751
MPU_DSI_D0_P: J1.S125 U2.H2 | length 44.9
  Top Layer w0.128: U2.H2@55.7,33.368 55.751,33.368 56.184,32.935 58.464,32.935 59.689,31.709 59.689,30.567 59.563,30.44 v1(59.563,30.353)
  Bottom Layer w0.128: v1(59.563,30.353) 59.563,15.462 70.327,4.698 75.661,4.698 76.643,3.716 76.643,1.805 J1.S125@76.697,1.751
MPU_DSI_D1_N: J1.S129 U2.J1 | length 45.7
  Top Layer w0.128: U2.J1@56.5,34.168 56.544,34.125 56.681,34.125 56.689,34.117 58.72,34.117 61.342,31.495 61.342,30.567 61.468,30.44 v1(61.468,30.353)
  Bottom Layer w0.128: v1(61.468,30.353) 61.468,30.266 61.342,30.139 61.342,16.288 71.639,5.99 76.306,5.99 78.301,3.995 78.589,3.707 78.589,1.859 J1.S129@78.697,1.751
MPU_DSI_D1_P: J1.S128 U2.J2 | length 46
  Top Layer w0.128: U2.J2@55.7,34.168 55.751,34.168 56.184,33.735 58.562,33.735 60.959,31.337 60.959,30.567 60.833,30.44 v1(60.833,30.353)
  Bottom Layer w0.128: v1(60.833,30.353) 60.833,30.266 60.959,30.139 60.959,16.13 71.481,5.608 76.148,5.608 78.143,3.613 78.143,1.805 J1.S128@78.197,1.751
MPU_DSI_D2_N: J1.S132 U2.K1 | length 48
  Top Layer w0.128: U2.K1@56.5,34.968 56.544,34.925 56.681,34.925 56.689,34.917 57.649,34.917 57.656,34.925 59.087,34.925 62.612,31.401 62.612,30.567 62.738,30.44 v1(62.738,30.353)
  Bottom Layer w0.128: v1(62.738,30.353) 62.738,30.266 62.612,30.139 62.612,25.636 62.645,25.603 62.645,24.943 62.612,24.91 62.612,15.916 71.902,6.625 77.481,6.625 77.705,6.401 79.855,4.251 80.197,3.909 80.197,1.966 80.089,1.859 J1.S132@80.197,1.751
MPU_DSI_D2_P: J1.S131 U2.K2 | length 48.3
  Top Layer w0.128: U2.K2@55.7,34.968 55.751,34.968 56.184,34.535 57.807,34.535 57.815,34.543 58.929,34.543 62.229,31.242 62.229,30.567 62.103,30.44 v1(62.103,30.353)
  Bottom Layer w0.128: v1(62.103,30.353) 62.103,30.266 62.229,30.139 62.229,25.478 62.263,25.444 62.263,25.102 62.229,25.068 62.229,15.758 71.744,6.243 77.323,6.243 79.697,3.869 79.697,1.86 79.643,1.805 J1.S131@79.697,1.751
MPU_DSI_D3_N: J1.S138 U2.L3 | length 57.1
  Top Layer w0.16: U2.L3@54.9,35.768 v1(55.283,36.151)
  Bottom Layer w0.128: v1(55.283,36.151) 55.283,36.124 55.074,35.915 55.074,35.775 55.467,35.382 56.725,35.382 56.955,35.152 64.321,35.152 66.04,33.433 66.04,31.623 65.816,31.399 64.39,29.973 64.39,17.009 69.3,12.099 71.791,9.607 73.017,8.382 78.79,8.382 79.339,7.832 79.339,7.578 79.712,7.206 80.551,7.206 83.197,4.56 83.197,3.237 83.089,3.237 83.138,3.188 83.138,1.81 J1.S138@83.197,1.751
MPU_DSI_D3_P: J1.S137 U2.L4 | length 57
  Top Layer w0.16: U2.L4@54.1,35.768 v1(54.483,36.151)
  Bottom Layer w0.128: v1(54.483,36.151) 54.483,36.124 54.692,35.915 54.692,35.616 55.309,35 56.567,35 56.797,34.77 64.163,34.77 65.658,33.275 65.658,31.781 64.008,30.131 64.008,16.851 69.142,11.717 71.409,9.449 72.859,8 78.631,8 78.957,7.674 78.957,7.42 79.553,6.824 80.393,6.824 82.697,4.52 82.697,1.978 82.643,1.923 82.756,1.81 J1.S137@82.697,1.751
MPU_DSI_REXT: R32.2 U2.H5 | length 1.3
  Top Layer w0.128: U2.H5@53.3,33.368 v1(53.683,33.751)
  Bottom Layer w0.15: v1(53.683,33.751) 53.683,33.681 53.848,33.516 R32.2@53.848,33.103
MPU_DSI_TE: J1.S144 U2.H3 | length 52.7
  Top Layer w0.15: U2.H3@54.9,33.368 55.278,32.991 55.278,32.456 55.588,32.146 55.999,32.146 56.23,31.916 56.603,31.916 60.198,28.321 60.198,16.383 66.633,9.948 69.316,9.948 71.013,8.251 v1@79.498,8.251
  Bottom Layer w0.15: v1(79.502,8.255) 81.407,8.255 86.197,3.465 J1.S144@86.197,1.751
MPU_GMDC: U2.K16 U3.36 | length 19.3
  Top Layer w0.15: v1(39.547,35.372) 44.097,35.372 U2.K16@44.5,34.968
  Bottom Layer w0.15: U3.36@28.708,27.914 28.758,27.964 28.758,28.393 35.737,35.372 v1(39.547,35.372)
MPU_GMDIO: U2.R14 U3.37 | length 22.5
  Top Layer w0.15: v1@45.722,39.346 U2.R14@46.1,38.968
  Bottom Layer w0.15: U3.37@29.383,27.239 29.383,28.256 35.991,34.864 39.801,34.864 44.307,39.37 v1(45.72,39.37)
MPU_GPIO_PB15: J1.P110 U2.C7 | length 36.9
  Top Layer w0.15: U2.C7@51.7,29.368 52.578,28.491 52.578,27.059 54.716,24.921 54.716,16.277 65.003,5.99 67.924,5.99 69.931,3.983 J1.P110@69.931,1.751
MPU_GPIO_PC2: J1.P115 U2.A3 | length 35
  Top Layer w0.15: U2.A3@54.9,27.768 54.9,27.287 56.515,25.672 56.515,17.018 65.659,7.874 68.58,7.874 72.431,4.023 J1.P115@72.431,1.751
MPU_GPIO_PC3: J1.P116 U2.B3 | length 36
  Top Layer w0.15: U2.B3@54.9,28.568 55.278,28.191 55.278,27.298 56.896,25.68 56.896,17.145 65.786,8.255 68.707,8.255 72.931,4.031 J1.P116@72.931,1.751
MPU_GPIO_PC4: J1.P113 U2.A4 | length 34.9
  Top Layer w0.15: U2.A4@54.1,27.768 54.1,27.18 55.753,25.527 55.753,16.764 65.405,7.112 68.326,7.112 71.431,4.007 J1.P113@71.431,1.751
MPU_GPIO_PC5: J1.P114 U2.B4 | length 35.9
  Top Layer w0.15: U2.B4@54.1,28.568 54.478,28.191 54.478,27.564 54.483,27.559 54.483,27.315 56.134,25.664 56.134,16.891 65.532,7.493 68.453,7.493 71.931,4.015 J1.P114@71.931,1.751
MPU_GPIO_PC6: J1.P111 U2.A5 | length 34.8
  Top Layer w0.15: U2.A5@53.3,27.768 53.3,26.964 55.05,25.214 55.05,16.451 65.151,6.35 68.072,6.35 70.431,3.991 J1.P111@70.431,1.751
MPU_GPIO_PC7: J1.P112 U2.B5 | length 35.8
  Top Layer w0.15: U2.B5@53.3,28.568 53.721,28.148 53.721,27.051 55.372,25.4 55.372,16.637 65.278,6.731 68.199,6.731 70.931,3.999 J1.P112@70.931,1.751
MPU_GPIO_PC10: J1.P108 U2.A7 | length 34.9
  Top Layer w0.15: U2.A7@51.7,27.768 51.7,27.04 53.975,24.765 53.975,16.002 64.77,5.207 67.691,5.207 68.931,3.967 J1.P108@68.931,1.751
MPU_GPIO_PC11: J1.P109 U2.B7 | length 35.9
  Top Layer w0.15: U2.B7@51.7,28.568 52.197,28.072 52.197,27.051 54.356,24.892 54.356,16.129 64.876,5.609 67.805,5.609 69.206,4.208 69.206,4.2 69.431,3.975 J1.P109@69.431,1.751
MPU_GPIO_PC24: J1.P119 U2.C1 | length 36.8
  Top Layer w0.15: U2.C1@56.5,29.368 57.933,27.936 57.933,17.632 66.167,9.398 69.088,9.398 74.431,4.055 J1.P119@74.431,1.751
MPU_GPIO_PC28: J1.P118 U2.B1 | length 35.7
  Top Layer w0.15: U2.B1@56.5,28.568 57.658,27.411 57.658,17.399 66.04,9.017 68.961,9.017 73.931,4.047 J1.P118@73.931,1.751
MPU_GPIO_PC30: J1.P117 U2.A2 | length 35.1
  Top Layer w0.15: U2.A2@55.7,27.768 55.7,27.265 57.277,25.688 57.277,17.272 65.913,8.636 68.834,8.636 73.431,4.039 J1.P117@73.431,1.751
MPU_GRX0: R20.2 U2.T8 | length 29.5
  Top Layer w0.16: U2.T8@50.9,39.768 v1(51.283,40.151)
  Bottom Layer w0.15: R20.2@27.452,36.696 27.452,37.501 32.75,42.799 50.419,42.799
  Bottom Layer w0.16: 50.419,42.799 51.283,41.935 v1(51.283,40.151)
MPU_GRX1: R21.2 U2.L16 | length 20.4
  Top Layer w0.15: v1(26.212,37.658) 27.355,37.658 27.797,38.1 39.613,38.1 41.579,36.134 43.532,36.134 43.544,36.146 43.857,36.146 43.869,36.134 44.135,36.134 U2.L16@44.5,35.768
  Bottom Layer w0.15: R21.2@26.212,36.694 v1(26.212,37.658)
MPU_GRX2: R22.2 U2.G16 | length 23.5
  Top Layer w0.15: v1(24.949,37.663) 25.274,37.338 25.931,37.338 26.036,37.233 26.388,37.233 26.538,37.383 27.469,37.383 27.911,37.825 31.125,37.825 36.184,32.766 36.387,32.766 36.597,32.556 39.8,32.556 39.822,32.534 41.673,32.534 41.904,32.766 42.164,32.766 42.344,32.946 44.123,32.946 U2.G16@44.5,32.568
  Bottom Layer w0.15: R22.2@24.942,36.694 24.949,36.701 v1(24.949,37.663)
MPU_GRX3: R23.2 U2.L15 | length 24.9
  Top Layer w0.15: v1(23.672,37.658) 23.672,37.692 24.097,38.117 24.097,38.575 24.24,38.718 40.265,38.718 41.706,37.277 42.976,37.277 v1(43.357,36.896) ; v1(44.881,35.349) U2.L15@45.3,35.768
  Bottom Layer w0.15: R23.2@23.672,36.694 v1(23.672,37.658) ; v1(43.357,36.896) 43.357,36.885 44.881,35.361 v1(44.881,35.349)
MPU_GRXCK: R15.1 U2.D17 U3.35 | length 18.8
  Top Layer w0.15: v1(29.117,29.496) 29.623,29.496 31.115,30.988 37.499,30.988 37.543,31.032 37.895,31.032 38.066,30.861 42.291,30.861 42.944,30.208 43.661,30.208 U2.D17@43.7,30.168
  Bottom Layer w0.15: U3.35@28.208,27.914 28.208,28.605 29.514,29.911 R15.1@29.514,30.572
MPU_GRXCTL: R14.1 U2.R8 U3.33 | length 36
  Top Layer w0.16: v1(50.518,39.351) U2.R8@50.9,38.968
  Bottom Layer w0.15: U3.33@27.208,27.914 27.208,33.105 28.675,34.572 R14.1@28.675,35.146 29.486,35.146 36.759,42.418 42.53,42.418 42.556,42.444 49.238,42.444 49.264,42.418 50.038,42.418 50.518,41.938 v1(50.518,39.351)
MPU_GTX0: U2.N16 U3.19 | length 48.8
  Top Layer w0.14: v1(13.893,25.085) 13.88,25.098 13.88,25.52 13.512,25.888 13.512,28.641 23.252,38.381 23.252,38.467 23.967,39.182 25.609,39.182 25.731,39.304 40.325,39.304 41.888,37.741 44.128,37.741 U2.N16@44.5,37.368
  Bottom Layer w0.14: v1(13.893,25.085) 20.37,25.085 20.716,24.739 U3.19@22.533,24.739
MPU_GTX1: U2.E17 U3.20 | length 39.8
  Top Layer w0.15: v1(14.528,25.593) 20.37,25.593 25.743,30.966 30.705,30.966 31.045,31.307 38.162,31.307 38.333,31.136 42.405,31.136 42.574,30.966 43.698,30.966 U2.E17@43.7,30.968
  Bottom Layer w0.15: v1(14.528,25.593) 14.549,25.572 20.265,25.572 20.598,25.239 U3.20@22.533,25.239
MPU_GTX2: U2.J16 U3.21 | length 40.8
  Top Layer w0.15: v1(15.036,26.101) 18.465,26.101 24.942,32.578 v1(35.356,32.578) ; v1@41.007,34.546 44.123,34.546 U2.J16@44.5,34.168
  Bottom Layer w0.15: v1(15.036,26.101) 16.171,26.101 16.425,25.847 20.379,25.847 20.487,25.739 U3.21@22.533,25.739 ; v1(35.356,32.578) 37.007,34.229 40.734,34.229 v1(41.021,34.516)
MPU_GTX3: U2.N15 U3.22 | length 41.5
  Top Layer w0.15: v1(15.671,26.99) 18.846,26.99 24.942,33.086 v1(34.975,33.086) ; v1(44.881,37.785) 45.298,37.368 U2.N15@45.3,37.368
  Bottom Layer w0.15: v1(15.671,26.99) 16.434,26.227 20.179,26.227 20.191,26.239 U3.22@22.533,26.239 ; v1(34.975,33.086) 36.478,34.589 39.915,34.589 43.111,37.785 v1(44.881,37.785)
MPU_GTXCK: U2.F16 U3.24 | length 27
  Top Layer w0.15: v1(21.132,27.244) 25.511,31.623 26.011,31.623 26.053,31.665 42.265,31.665 42.286,31.644 42.986,31.644 43.489,32.146 44.123,32.146 U2.F16@44.5,31.768
  Bottom Layer w0.15: v1(21.132,27.244) 21.135,27.242 22.531,27.242 U3.24@22.533,27.239
MPU_GTXCTL: U2.R13 U3.25 | length 42.2
  Top Layer w0.15: v1(46.609,43.307) 46.609,41.329 46.523,41.243 46.523,39.346 U2.R13@46.9,38.968
  Bottom Layer w0.15: U3.25@23.208,27.914 23.208,28.47 21.209,30.469 21.209,36.592 27.924,43.307 v1(46.609,43.307)
MPU_I2C0_SCL: J1.P121 R33.1 U2.R1 U5.4 | length 73
  Top Layer w0.15: U2.R1@56.5,38.968 56.508,38.961 58.692,38.961 58.847,39.116 v1(58.928,39.116) 59.782,39.116 64.941,33.957 64.941,32.336 64.728,32.123 64.728,15.401 64.77,15.359 64.77,15.24 71.247,8.763 79.756,8.763 80.264,8.255 80.308,8.255 80.308,7.029 79.756,6.477 77.597,6.477 75.431,4.311 J1.P121@75.431,1.751 ; v1(62.738,39.243) 62.819,39.243 63.052,39.476 63.072,39.476 64.389,40.793 64.389,42.426 63.881,42.934 v1(63.881,44.196) ; R33.1@63.46,48.133 v1(64.262,48.133) 64.756,48.133 U5.4@64.782,48.159
  Bottom Layer w0.15: v1(58.928,39.116) 62.53,39.116 62.657,39.243 v1(62.738,39.243) ; v1(63.881,44.196) 64.385,44.7 64.385,46.314 64.262,46.438 v1(64.262,48.133)
MPU_I2C0_SDA: J1.P122 R39.1 U2.T3 U5.5 | length 71.9
  Top Layer w0.15: U2.T3@54.9,39.768 55.278,40.146 57.886,40.146 58.071,39.961 58.436,39.961 58.646,39.751 59.571,39.751 64.897,34.425 64.897,34.39 65.216,34.071 65.216,32.222 65.003,32.009 65.003,15.634 65.024,15.613 65.024,15.494 71.374,9.144 79.883,9.144 80.645,8.382 80.645,6.858 79.883,6.096 77.724,6.096 75.931,4.303 J1.P122@75.931,1.751 ; v1(62.23,39.751) 62.958,39.751 64.052,40.845 64.052,42.374 63.373,43.053 63.373,45.072 64.769,45.072 U5.5@64.782,45.059
  Bottom Layer w0.15: v1(58.674,39.751) v1(62.23,39.751)
MPU_I2C12_SCL: J1.S48 R34.1 U2.C10 | length 42.3
  Top Layer w0.128: v1(48.918,28.986) U2.C10@49.3,29.368
  Top Layer w0.15: v1(36.704,4.571) R34.1@36.703,6.14
  Bottom Layer w0.15: J1.S48@36.692,1.75 36.792,1.85 36.792,3.288 36.817,3.313 36.817,3.383 36.957,3.523 36.957,4.03 36.728,4.259 36.728,4.547 v1(36.704,4.571) ; v1@36.692,4.583 36.089,5.186 33.922,5.186 33.253,5.855 33.253,12.687 41.415,20.849 47.519,20.849 48.895,22.225 v1@48.895,28.986
MPU_I2C12_SDA: J1.S49 R31.1 U2.A10 | length 41.1
  Top Layer w0.15: v1(37.243,5.05) 37.29,5.098 37.29,6.092 R31.1@37.338,6.14 ; v1(48.387,20.574) 49.3,21.487 U2.A10@49.3,27.768
  Bottom Layer w0.15: J1.S49@37.192,1.75 37.292,1.85 37.292,3.288 37.317,3.313 37.317,3.383 37.592,3.658 37.592,4.701 v1(37.243,5.05) ; v1@37.192,5.105 36.836,5.461 34.036,5.461 33.528,5.969 33.528,12.573 41.529,20.574 v1(48.387,20.574)
MPU_NRST: C89.1 J1.P127 R35.1 SW2.1 SW2.2 U1.2 U2.P5 | length 123
  Top Layer w0.15: U2.P5@53.3,38.168 53.721,38.589 53.721,41.148 54.356,41.783 57.531,41.783 v1(58.017,41.297) 58.414,41.297 65.491,34.22 65.491,32.108 65.278,31.895 65.278,15.748 71.501,9.525 80.01,9.525 81.005,8.53 81.005,6.583 78.431,4.009 J1.P127@78.431,1.751 ; v1(60.579,41.529) 60.66,41.529 60.782,41.651 60.794,41.651 62.611,43.468 v1(62.611,45.847) ; SW2.1@74.444,47.081 74.48,47.117 v1(78.994,47.117) 83.508,47.117 SW2.2@83.544,47.081 ; v1(77.597,29.845) 78.479,29.845 U1.2@78.499,29.825 ; R35.1@83.566,48.514 83.566,47.103 SW2.2@83.544,47.081 ; C89.1@85.344,47.359 83.822,47.359 SW2.2@83.544,47.081
  Bottom Layer w0.15: v1(58.017,41.297) 60.347,41.297 v1(60.579,41.529) ; v1(62.611,45.847) 62.611,47.601 64.008,48.998 74.161,49.114 cw(c74.168,48.514) 74.175,49.114 77.632,49.114 78.994,47.752 v1(78.994,47.117) 78.994,45.974 76.968,43.948 76.968,31.902 77.597,31.272 v1(77.597,29.845)
MPU_QSPI_CLK: J1.P56 U2.A9 U4.6 | length 32.6
  Top Layer w0.15: J1.P56@40.942,1.751 40.942,5.382 v1(41.91,6.35) ; U4.6@46.465,11.75 v1(47.777,11.75) 49.088,11.75 50.673,13.335 50.673,19.812 50.1,20.385 U2.A9@50.1,27.768
  Bottom Layer w0.15: v1(41.91,6.35) 47.31,11.75 v1(47.777,11.75)
MPU_QSPI_CS: R26.1 U2.B11 U4.1 | length 23.3
  Top Layer w0.15: R26.1@37.355,14.288 38.723,14.288 38.732,14.297 39.962,14.297 43.126,14.297 44.429,15.6 44.429,18.521 46.228,20.32 47.498,20.32 48.895,21.717 48.895,28.174 U2.B11@48.5,28.568